# Altium PCB Buck Converter Backup.PcbDoc
Units mil, origin at the board's own origin, x right, y up, seen from the top; angles counter-clockwise.
Board outline 2160 x 1643.57 mil, 4 copper layers (Top Layer, L2 - GND, L3 - POWER, Bottom Layer), stack 23.756 mil thick; 39 components, 21 nets, 105 pads, 73 vias.
Unrouted connection lines stored in the file: 7.
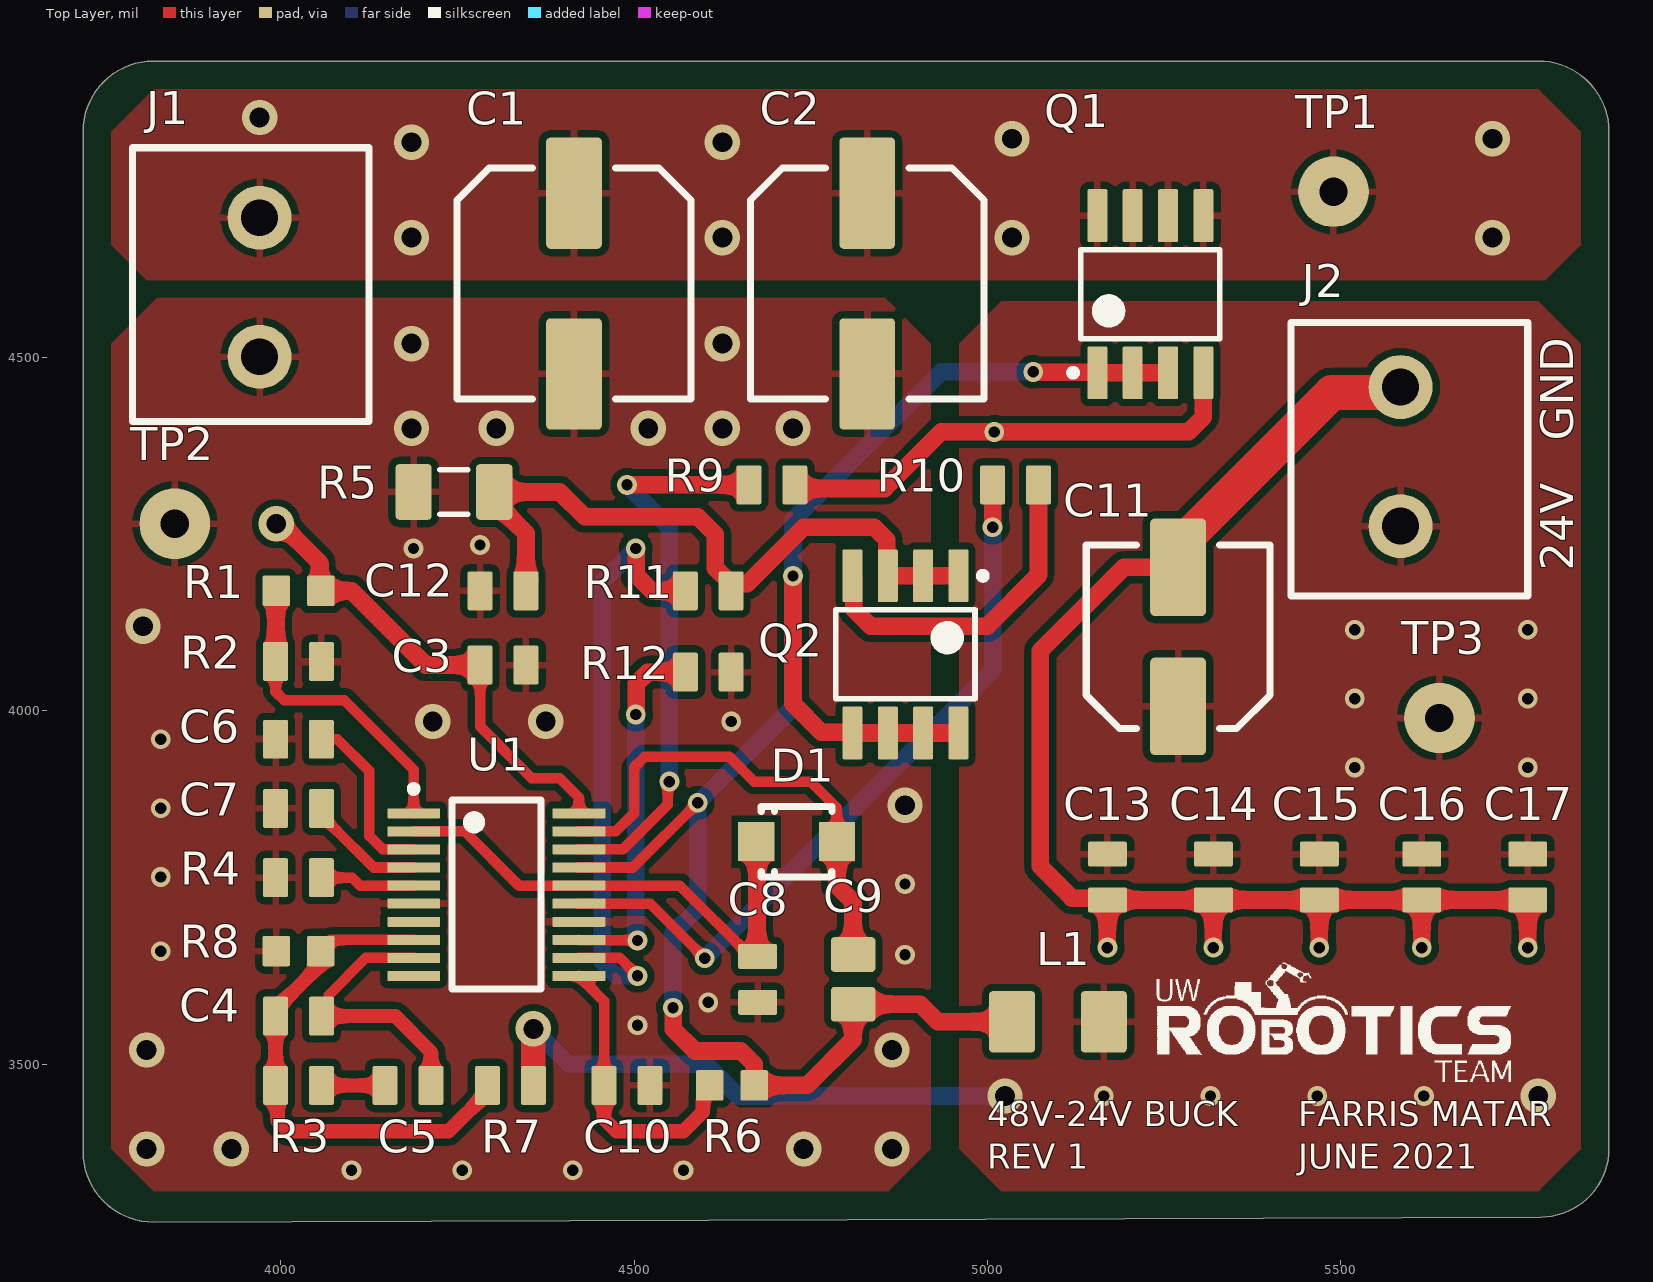
[diagram p0: Top Layer view]
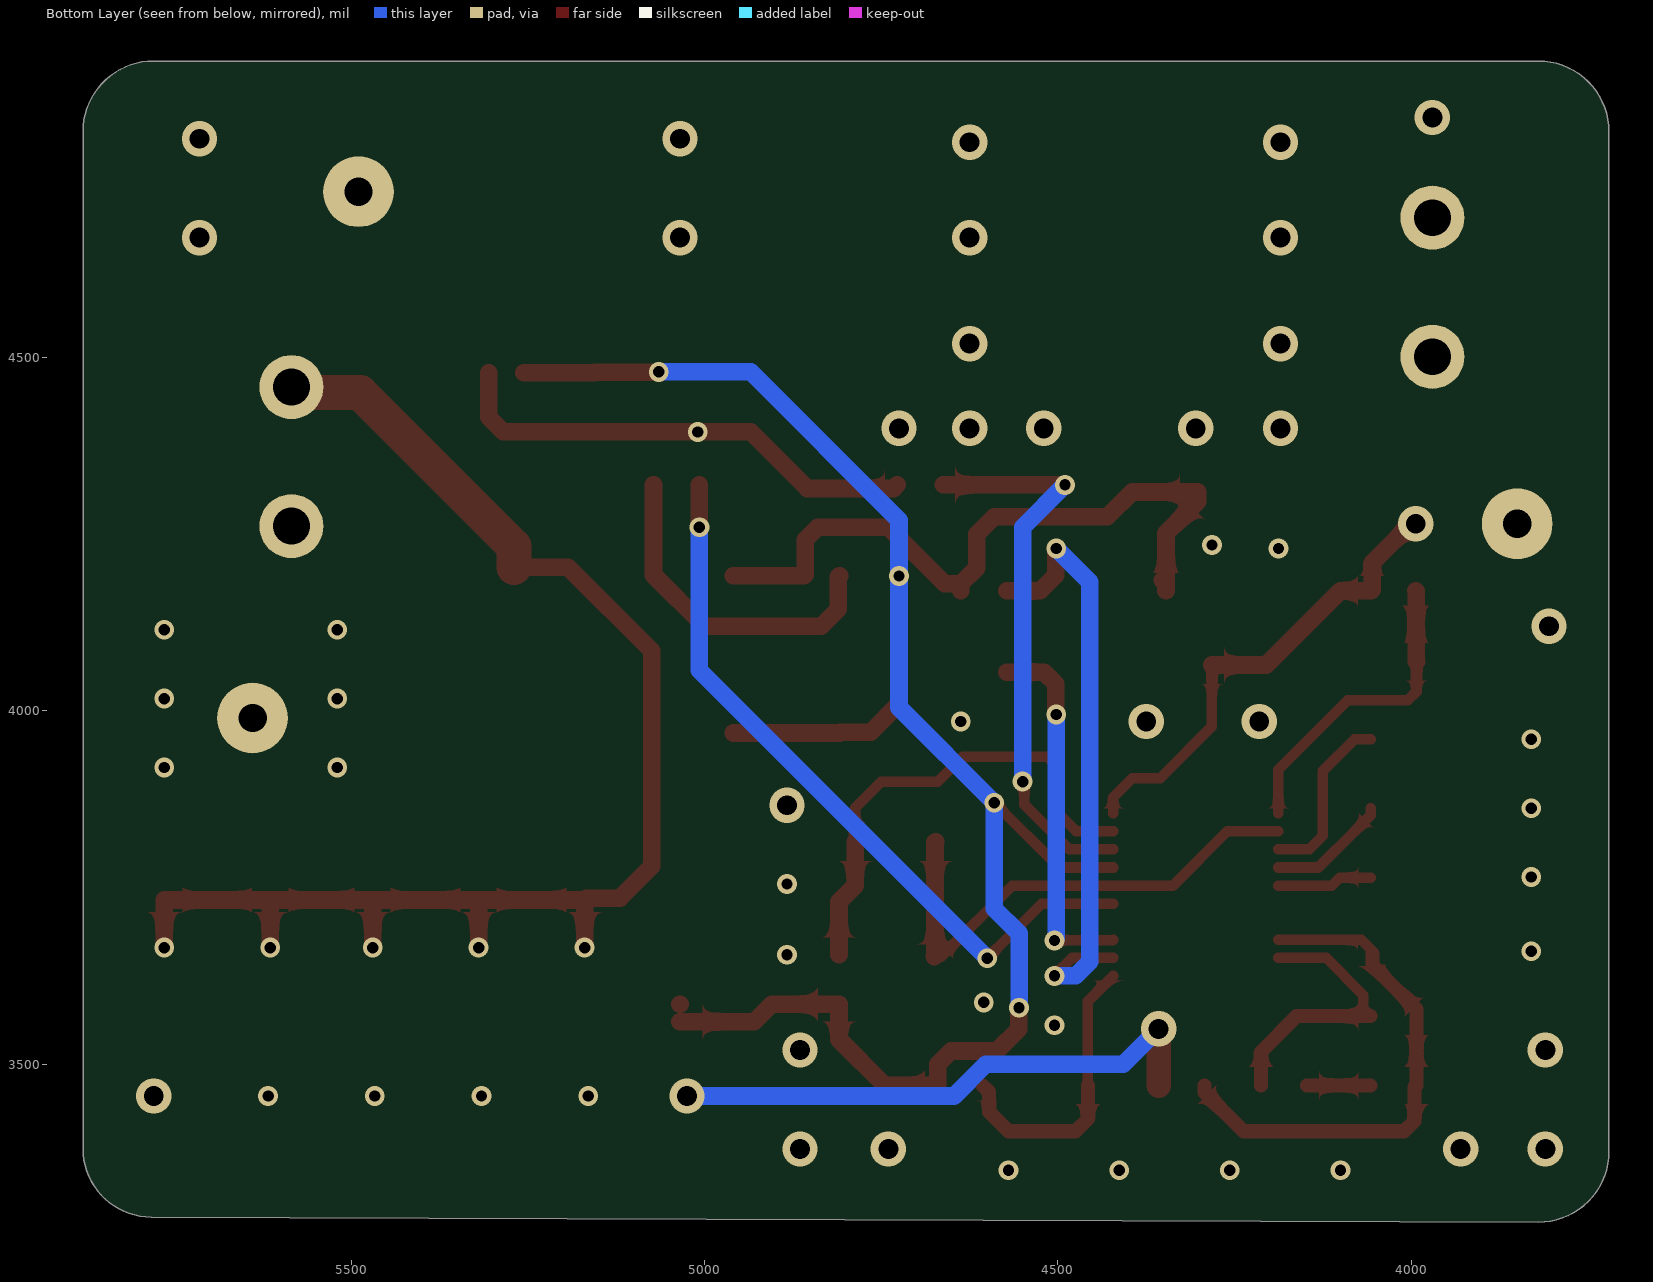
[diagram p1: Bottom Layer view, seen from below]
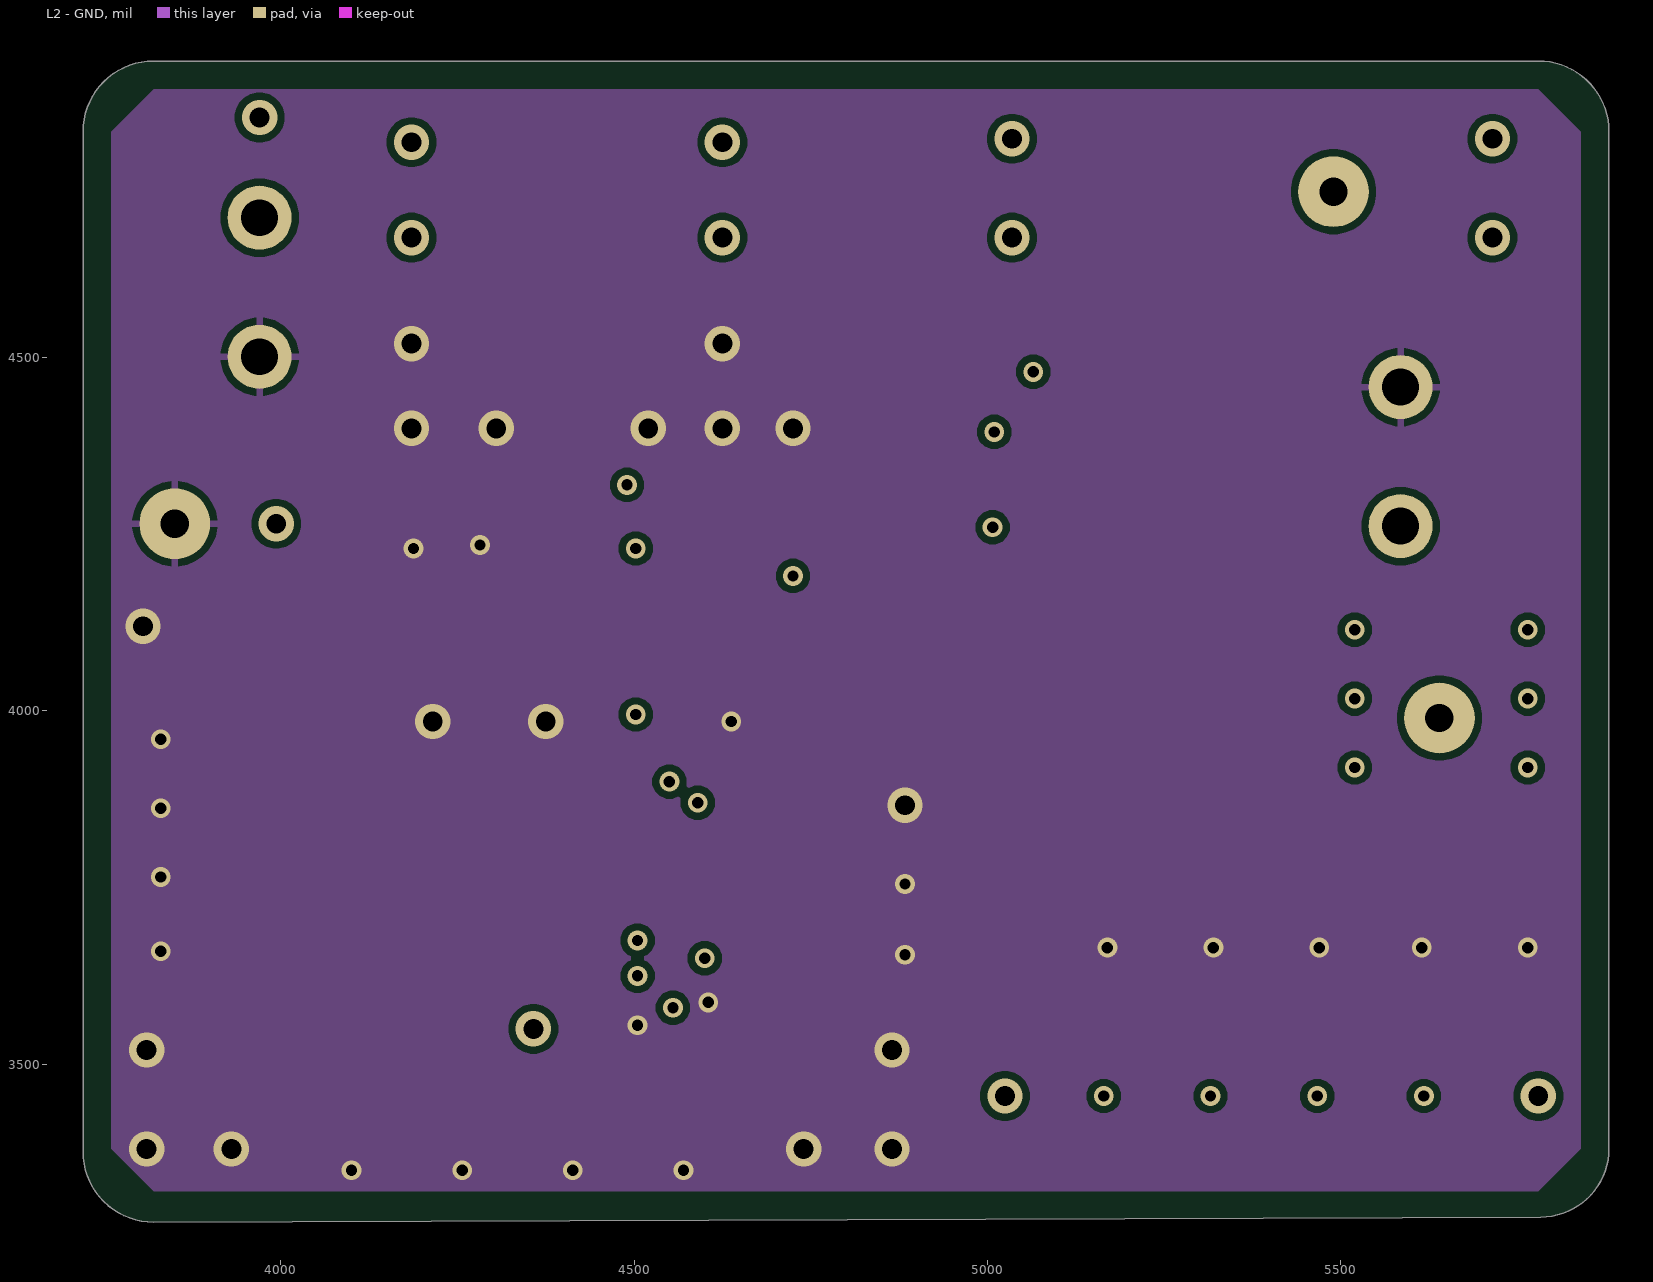
[diagram p2: L2 - GND]
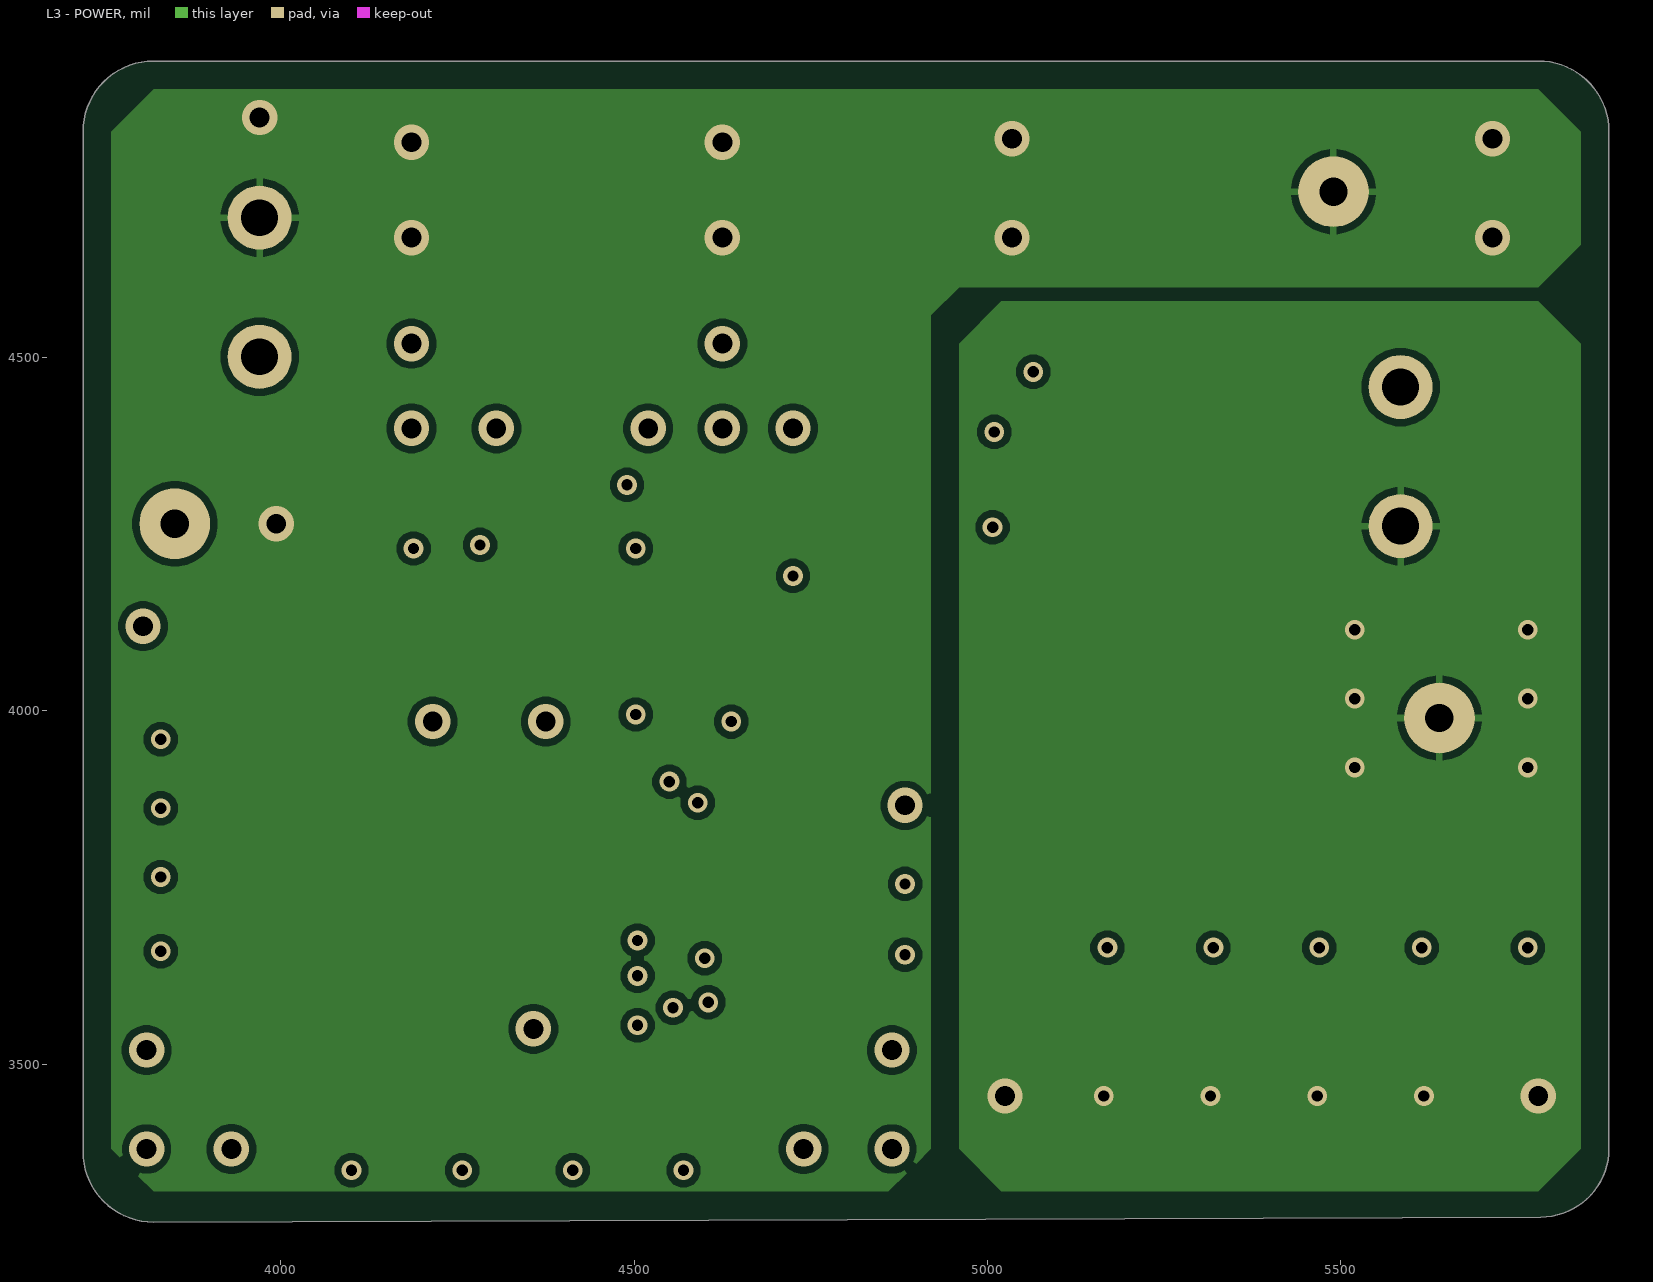
[diagram p3: L3 - POWER]
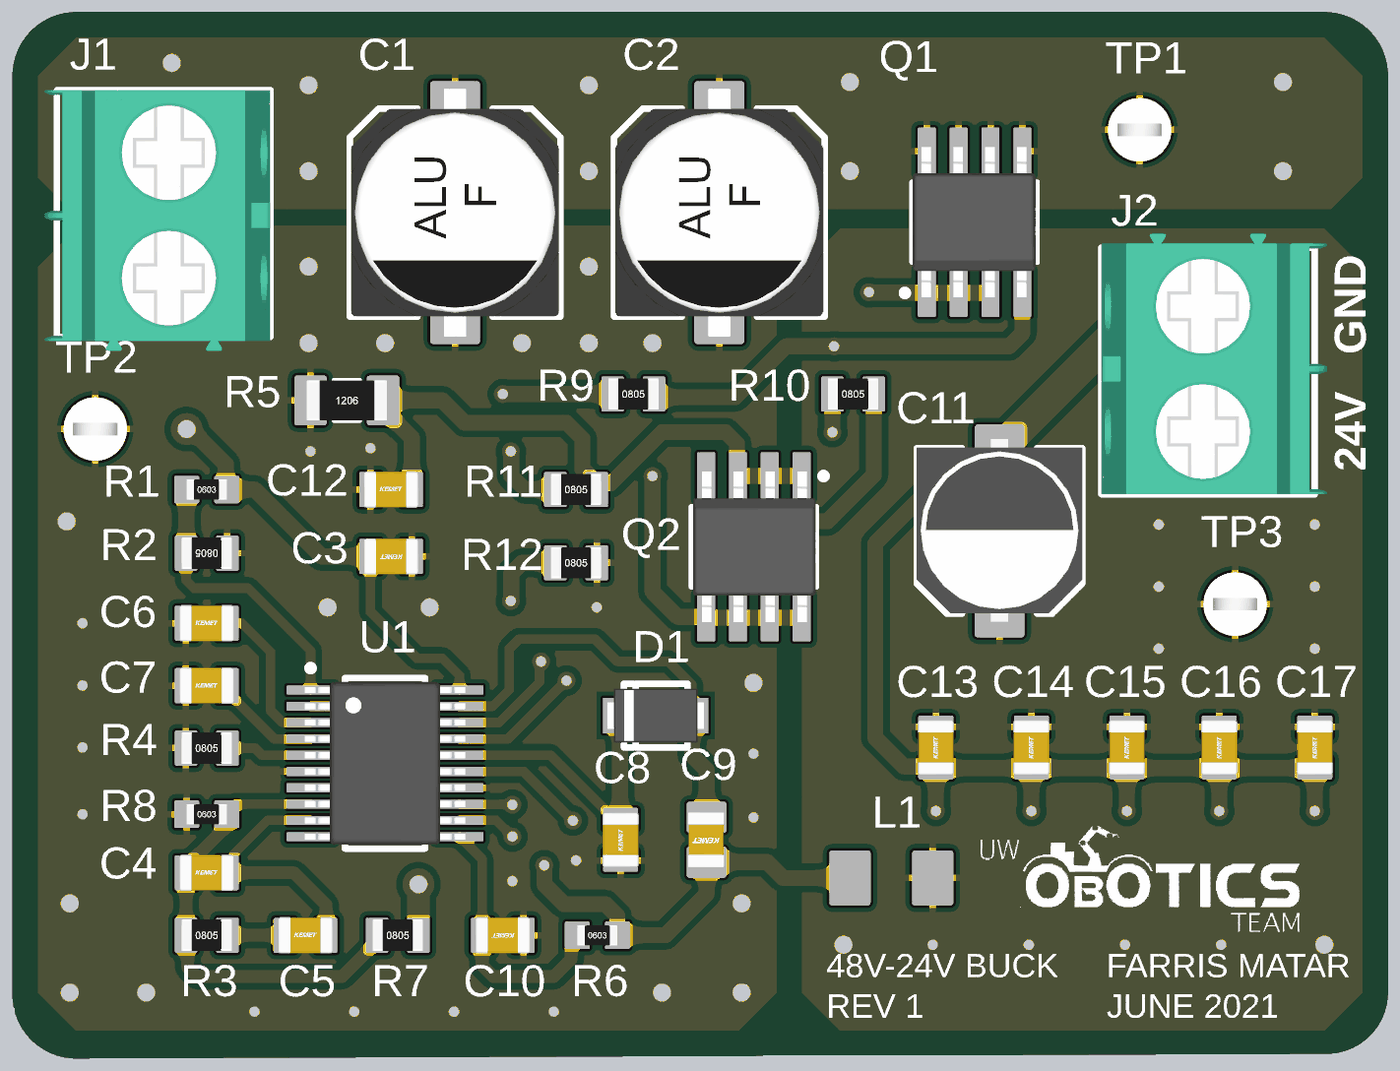
[diagram p4: 3D render of the assembled board from above, using the file's embedded part models]

## Layer stack, top to bottom
Top Solder: solder mask 0.4, Solder Resist, Dk 3.5
Top Layer: signal copper 1.4
Dielectric 2: prepreg 2.8, PP-006, Dk 4.1
L2 - GND: signal copper 1.378
Dielectric 1: dielectric 12.6, FR-4, Dk 4.8
L3 - POWER: signal copper 1.378
Dielectric 3: prepreg 2.8, PP-006, Dk 4.1
Bottom Layer: signal copper 1.4
Bottom Solder: solder mask 0.4, Solder Resist, Dk 3.5

## Board outline
3720.01,3376.43 3720,4820 cw(c3820,4820) 3820,4920 5780,4920 cw(c5780,4820) 5880,4820 5880,3378.11 5879.97,3380.3 cw(c5783.35,3380.3) 5783.35,3283.68 3820.01,3276.43 cw(c3820.01,3376.43)

## Design rules (kind name [scope] priority, off if disabled: settings)
Clearance [All] p1: gap=10 ignorepadtopadclearanceinfootprint=FALSE except(0: Arc-Hole Track-Hole SMDPad-Hole THPad-Hole Via-Hole Fill-Hole Poly-Hole Region-Hole Text-Hole)
PolygonConnect [All] p1: thpad.connectstyle=Relief thpad.reliefconductorwidth=10 thpad.reliefentries=4 thpad.polygonreliefangle="90 Angle" thpad.airgapwidth=10 smdpad.connectstyle=Relief smdpad.reliefconductorwidth=10 smdpad.reliefentries=4 smdpad.polygonreliefangle="90 Angle" smdpad.airgapwidth=10 via.connectstyle=Direct via.reliefconductorwidth=10 via.reliefentries=4 via.polygonreliefangle="90 Angle" via.airgapwidth=10
RoomDefinition "Buck Converter" [InComponentClass('Buck Converter')] p1: confinementstyle=ConfineIn formatcopy=TRUE lockcomponents=FALSE outline 3660,3060 5960,3060 5960,5000 3660,5000
RoutingVias [All] p1: holewidth=28 width=50 viastyle="Through Hole" minholewidth=28 minwidth=50 maxholewidth=28 maxwidth=50
SolderMaskExpansion [All] p1: expansion=4 istentingtop=FALSE
Width [All] p1: maxlimit=50 minlimit=10 preferedwidth=10 midlayer1_maxwidth=10 midlayer2_maxwidth=10 minimp=50.000000 maximp=50.000000 favimp=50.000000
30 further rules are at their usual default settings.

## Components (designator, comment, footprint, x,y, rotation, side; value= is the part's Value field where it differs from the comment)
C1 "CAP_22uF_80V_ALUM" RADIAL_PANASONIC_F 4415,4605 r180 top value=22µF
C2 "CAP_22uF_80V_ALUM" RADIAL_PANASONIC_F 4830,4605 r180 top value=22µF
C3 "CAP_0.1uF_100V_0805" CAP0805 4314.51,4065 r180 top value=0.1µF
C4 "CAP_150pF_16V_0805" CAP0805 4025,3568 r0 top value=150pF
C5 "CAP_330pF_50V_0805" CAP0805 4180,3470 r0 top value=330pF
C6 "CAP_0.47uF_25V_0805" CAP0805 4025,3960 r0 top value=0.47µF
C7 "CAP_0.015uF_50V_0805" CAP0805 4025,3862 r0 top value=0.015µF
C8 "CAP_0.47uF_25V_0805" CAP0805 4675,3620 r90 top value=0.47µF
C9 "CAP_0.22uF_100V_0805" CAP2012 4810,3620 r90 top value=0.22μF
C10 "CAP_820pF_50V_0805" CAP0805 4490,3470 r180 top value=820pF
C11 "CAP_100uF_35V_ALUM" RADIAL_CORNELL_D 5270,4105 r0 top value=100µF
C12 "CAP_NU_0805" CAP0805 4314.51,4170 r0 top value=NU
C13 "CAP_NU_0805" CAP0805 5765,3765 r90 top value=NU
C14 "CAP_NU_0805" CAP0805 5615,3765 r90 top value=NU
C15 "CAP_NU_0805" CAP0805 5470,3765 r90 top value=NU
C16 "CAP_NU_0805" CAP0805 5320,3765 r90 top value=NU
C17 "CAP_NU_0805" CAP0805 5170,3765 r90 top value=NU
D1 "DIO_SCHOTTKY_100V_150mA" SOD-123_FLAT 4730,3815 r0 top
J1 "CON_2POS_SCREW_TERM" 1935161 3970,4599.8 r270 top
J2 "CON_2POS_SCREW_TERM" 1935161 5585,4360 r90 top
L1 "IND_47uH_13.0A" IND_SIGNAL_SCIHP0412-R047 5100,3560 r180 top
Q1 "NMOS_100V_10.3A" 8-SOIC_NMOS 5230,4590 r90 top
Q2 "NMOS_100V_10.3A" 8-SOIC_NMOS 4885,4080 r270 top
R1 "RES_54.9kΩ_0603_1%" RES0603 3993.5,4170 r0 top value=54.9kΩ
R2 "RES_2.32kΩ_0805_1%" RES0805 4025,4070 r180 top value=2.32kΩ
R3 "RES_133kΩ_0805_1%" RES0805 4025,3470 r0 top value=133kΩ
R4 "RES_12.1kΩ_0805_1%" RES0805 4025,3764 r0 top value=12.1kΩ
R5 "RES_0.015Ω_1206_1%" RES1206 4245,4310 r0 top value=0.015Ω
R6 "RES_267kΩ_0603_1%" RES0603 4607.01,3470 r0 top value=267kΩ
R7 "RES_34.8kΩ_0805_1%" RES0805 4325,3470 r0 top value=34.8kΩ
R8 "RES_1.2kΩ_0603_1%" RES0603 3993.5,3660.09 r0 top value=1.2kΩ
R9 "RES_0Ω_0805" RES0805 4695,4320 r0 top value=0Ω
R10 "RES_0Ω_0805" RES0805 5040,4320 r0 top value=0Ω
R11 "RES_0Ω_0805" RES0805 4605,4170 r0 top value=0Ω
R12 "RES_0Ω_0805" RES0805 4605,4055 r0 top value=0Ω
TP1 "TESTPOINT_LOOP" TESTPOINT_LOOP 5490,4735 r0 top
TP2 "TESTPOINT_LOOP" TESTPOINT_LOOP 3850,4265 r0 top
TP3 "TESTPOINT_LOOP" TESTPOINT_LOOP 5640,3990 r0 top
U1 "BUCK_LM5117PWP" HTSSOP 4305,3740 r0 top

## Footprints (in the part's own frame and the unit in brackets; to place one, negate y for a bottom-side part, rotate by r counter-clockwise, add the part's x,y. Pads: shape width x height; smd on the part's side, far side on the other; paste and mask are expansions set on the pad)
8-SOIC_NMOS [mm]
  rrect15% 1.9x0.72 smd: 1(-2.827,-1.926) 2(-2.827,-0.656) 2(-2.827,0.614) 2(-2.827,1.884) 3(2.823,-1.926) 3(2.823,-0.656) 3(2.823,0.614) 3(2.823,1.884)
  silkscreen extent -2.95,-2.52 1.6,2.88, body extent -3,-2.45 3,2.45, height 1.63
1935161 [mm] "TERM BLK 2POS SIDE ENTRY 5MM PCB"
  round 2.3 hole 1.325: 1(-2.5,0) 2(2.5,0)
  silkscreen extent -5.01,-4.57 4.83,3.94, body extent -5.01,-5.06 5.39,3.94, height 11.41
CAP0805 [mm] "Chip Capacitor, Body 2.0x1.2mm, Height 0.45mm, IPC Medium Density"
  rrect15% 0.9x1.4 smd: 1(-0.825,0) 2(0.825,0)
  body extent -1.1,-0.73 1.1,0.73, height 1.39
CAP2012 [mm]
  rrect20% 1.25x1.6 smd: 1(-0.895,0) 2(0.895,0)
  body extent -1.1,-0.7 1.1,0.75, height 1.41
HTSSOP [mm]
  rrect15% 1.9x0.36 smd: 1(-2.97,2.925) 2(-2.97,2.275) 3(-2.97,1.625) 4(-2.97,0.975) 5(-2.97,0.325) 6(-2.97,-0.325) 7(-2.97,-0.975) 8(-2.97,-1.625) 9(-2.97,-2.275) 10(-2.97,-2.925) 11(2.97,-2.925) 12(2.97,-2.275) 13(2.97,-1.625) 14(2.97,-0.975) 15(2.97,-0.325) 16(2.97,0.325) 17(2.97,0.975) 18(2.97,1.625) 19(2.97,2.275) 20(2.97,2.925)
  silkscreen extent -3.09,-3.4 1.6,3.92, body extent -3.2,-3.25 3.2,3.25, height 1.1
IND_SIGNAL_SCIHP0412-R047 [mm]
  rrect15% 1.65x2.2 smd: 1(-1.65,0) 2(1.65,0)
RADIAL_CORNELL_D [mm] "Size D radial surface mount capacitor"
  rrect15% 2x3.5 smd: 1(0,-2.5) 2(0,2.5)
  silkscreen extent -3.3,-3.3 3.3,3.3, body extent -3.3,-3.62 3.3,3.67, height 5.9
RADIAL_PANASONIC_F [mm]
  rrect15% 2x4 smd: 1(0,-3.25) 2(0,3.25)
  silkscreen extent -4.2,-4.15 4.2,4.15, body extent -4.15,-4.95 4.15,4.95, height 10.2
RES0603 [mm] "Chip Resistor, Body 1.6x0.8mm, IPC Medium Density"
  rrect15% 1x1.1 smd: 1(0,0) 2(1.6,0)
  body extent 0,-0.4 1.6,0.4, height 0.46
RES0805 [mm] "Chip Resistor, 2-Leads, Body 2.00x1.25mm, IPC High Density"
  rrect15% 0.9x1.4 smd: 1(-0.825,0) 2(0.825,0)
  body extent -1,-0.62 1,0.63, height 0.61
RES1206 [mm] "Chip Resistor, Body 3.2x1.6mm, IPC Medium Density"
  rrect20% 1.3x2 smd: 1(-1.45,0) 2(1.45,0)
  silkscreen extent -0.5,-0.8 0.5,0.8, body extent -1.6,-0.8 1.6,0.8, height 0.61
SOD-123_FLAT [mm]
  rect 1.3x1.4 smd: 1(-1.45,0) 2(1.45,0)
  silkscreen extent -1.27,-1.27 1.27,1.27, body extent -1.93,-1.08 1.92,1.08, height 1.35
TESTPOINT_LOOP [mm]
  round 2.54 hole 1.02: 1(0,0)
  body extent -1.27,-1.27 1.27,1.27, height 4.57

## Part data
C1 C2: "CAP ALUM POLY 22UF 20% 80V SMD", Manufacturer 1="Panasonic Electronic Components", Manufacturer Part Number 1=EEH-ZA1K220P, Package/Footprint=SMD, Supplier Part Number 1=P122641CT-ND, Voltage Rating=80V, Mounting Type=SMD, Supplier 1=Digi-Key
C3: "CAP CER 0.1UF 100V X7R 0805", Manufacturer 1="TDK Corporation", Manufacturer Part Number 1=C2012X7R2A104K125AA, Package/Footprint=0805, Supplier Part Number 1=445-1418-1-ND, Voltage Rating=100V, Supplier 1=Digi-Key
C4: "CAP CER 150PF 16V X7R 0805", Manufacturer 1="Würth Elektronik", Manufacturer Part Number 1=885012207028, Package/Footprint=0805, Supplier Part Number 1=732-8028-1-ND, Voltage Rating=16V, Supplier 1=Digi-Key
C5: "CAP CER 330PF 50V C0G/NPO 0805", Manufacturer 1=Yageo, Manufacturer Part Number 1=CC0805JRNPO9BN331, Package/Footprint=0805, Supplier Part Number 1=311-1117-1-ND, Voltage Rating=50V, Supplier 1=Digi-Key
C6 C8: "CAP CER 0.47UF 25V X5R 0805", Manufacturer 1=KEMET, Manufacturer Part Number 1=C0805C474K3PAC7800, Package/Footprint=0805, Supplier Part Number 1=399-15508-1-ND, Voltage Rating=25V, Supplier 1=Digi-Key
C7: "CAP CER 0.015UF 50V C0G 0805", Manufacturer 1="TDK Corporation", Manufacturer Part Number 1=CGA4F2C0G1H153J085AA, Package/Footprint=0805, Supplier Part Number 1=445-6948-1-ND, Voltage Rating=50V, Supplier 1=Digi-Key
C9: "CAP CER 0.22UF 100V X7R 0805", Dielectric=X7R, Manufacturer 1="Taiyo Yuden", Manufacturer Part Number 1=HMJ212BB7224KGHT, Package/Footprint=0805, Supplier Part Number 1=587-4221-1-ND, Voltage Rating=100V, Mounting Type=SMD, Supplier 1=Digi-Key
C10: "CAP CER 820PF 50V C0G/NP0 0805", Manufacturer 1=KEMET, Manufacturer Part Number 1=C0805X821J5GAC7800, Package/Footprint=0805, Supplier Part Number 1=399-19481-1-ND, Voltage Rating=50V, Supplier 1=Digi-Key
C11: "CAP ALUM 100UF 20% 35V SMD", Manufacturer 1=Nichicon, Manufacturer Part Number 1=UWD1V101MCL1GS, Package/Footprint=SMD, Supplier Part Number 1=493-9685-1-ND, Voltage Rating=35V, Mounting Type=SMD, Supplier 1=Digi-Key
C12 C13 C14 C15 C16 C17: "PLACEHOLDER CAPACITOR 0805", Package/Footprint=0805, Mounting Type=SMD
D1: "DIODE SCHOTTKY 100V 150MA SOD123", Manufacturer 1="Comchip Technology", Manufacturer Part Number 1=CDBW46-G, Package/Footprint=SOD-123, Supplier Part Number 1=641-1964-1-ND, Mounting Type=SMD, Supplier 1=Digi-Key, Vr (Max)=100V
J1 J2: "TERM BLK 2POS SIDE ENTRY 5MM", Manufacturer 1="Phoenix Contact", Manufacturer Part Number 1=1935161, Package/Footprint=SMD, Supplier Part Number 1=277-1667-ND, Mounting Type=TH, Supplier 1=Digi-Key
L1: "FIXED IND 47NH 13A SMD", Current Rating=13A, DC Resistance (DCR)=3.75mR, Inductance=47μH, Inductance Tolerance=20%, Manufacturer 1="Signal Transformer", Manufacturer Part Number 1=SCIHP0412-R047, Saturation Current=32A, Supplier Part Number 1=595-1757-1-ND, Test Frequency=200kHz, Mounting Type=SMD, Supplier 1=Digi-Key
Q1 Q2: "MOSFET N-CH 100V 10.3A 8SOIC", Manufacturer 1="Vishay Siliconix", Manufacturer Part Number 1=SI4058DY-T1-GE3, Package/Footprint=8-SOIC, Supplier Part Number 1=SI4058DY-T1-GE3CT-ND, Id=10.3A, Supplier 1=Digi-Key, Vdss=100V, Vgs (Max)=±20V
R1: "RES SMD 54.9K OHM 1% 1/10W 0603", Manufacturer 1="Vishay Dale", Manufacturer Part Number 1=CRCW060354K9FKEA, Package/Footprint=0603, Supplier Part Number 1=541-54.9KHCT-ND, Supplier 1=Digi-Key
R2: "RES 2.32K OHM 1% 1/4W 0805", Manufacturer 1="Stackpole Electronics Inc", Manufacturer Part Number 1=RNCP0805FTD2K32, Package/Footprint=0805, Supplier Part Number 1=RNCP0805FTD2K32CT-ND, Supplier 1=Digi-Key
R3: "RES SMD 133K OHM 1% 1/8W 0805", Manufacturer 1=Yageo, Manufacturer Part Number 1=RC0805FR-07133KL, Package/Footprint=0805, Supplier Part Number 1=311-133KCRCT-ND, Supplier 1=Digi-Key
R4: "RES 12.1K OHM 1% 1/4W 0805", Manufacturer 1="Stackpole Electronics Inc", Manufacturer Part Number 1=RNCP0805FTD12K1, Package/Footprint=0805, Supplier Part Number 1=RNCP0805FTD12K1CT-ND, Supplier 1=Digi-Key
R5: "RES 0.015 OHM 1% 1/2W 1206", Manufacturer 1="Stackpole Electronics Inc", Manufacturer Part Number 1=CSR1206FK15L0, Package/Footprint=1206, Supplier Part Number 1=CSR1206FK15L0CT-ND, Supplier 1=Digi-Key
R6: "RES SMD 267K OHM 1% 1/10W 0603", Manufacturer 1="Panasonic Electronic Components", Manufacturer Part Number 1=ERJ-3EKF2673V, Package/Footprint=0603, Supplier Part Number 1=P267KHCT-ND, Supplier 1=Digi-Key
R7: "RES 34.8K OHM 1% 1/8W 0805", Manufacturer 1="Stackpole Electronics Inc", Manufacturer Part Number 1=RMCF0805FT34K8, Package/Footprint=0805, Supplier Part Number 1=RMCF0805FT34K8CT-ND, Supplier 1=Digi-Key
R8: "RES SMD 1.2K OHM 1% 1/10W 0603", Manufacturer 1=Yageo, Manufacturer Part Number 1=RC0603FR-071K2L, Package/Footprint=0603, Supplier Part Number 1=311-1.20KHRCT-ND, Supplier 1=Digi-Key
R9 R10 R11 R12: "RES 0 OHM JUMPER 1/8W 0805", LCSC Part #=C17477, Manufacturer 1="Panasonic Electronic Components", Manufacturer Part Number 1=ERJ-6GEY0R00V, Package/Footprint=0805, Supplier Part Number 1=P0.0ACT-ND, Mounting Type=SMD, Supplier 1=Digi-Key
TP1 TP2 TP3: "TESTPOINT THRUHOLE", Manufacturer 1="Keystone Electronics", Manufacturer Part Number 1=5002, Package/Footprint=TH, Supplier Part Number 1=36-5002-ND, Mounting Type=TH, Supplier 1=Digi-Key
U1: "IC REG CTRLR BUCK 20TSSOP", Manufacturer 1="Texas Instruments", Manufacturer Part Number 1=LM5117PMH/NOPB, Package/Footprint=20-HTSSOP, Supplier Part Number 1=296-41310-1-ND, Mounting Type=SMD, Supplier 1=Digi-Key

## Via types
v1: diameter 28, hole 16, Top Layer to Bottom Layer, tented both sides, 43 vias
v2: diameter 50, hole 28, Top Layer to Bottom Layer, tented both sides, 30 vias

## Nets (pads, with @x,y where several pads share a name; then routed paths per layer and width w, separated by ;. In a path a pad name is that pad's centre, name@x,y a point inside that pad or via, vN(x,y) a via of type N, cw(c..) or ccw(c..) an arc to the next point about the centre after c; other vN are vias at no path point)
24V: C11.1 C13.2 C14.2 C15.2 C16.2 C17.2 J2.1 L1.1 R7.2 TP3.1 | length 786.9
  Top Layer w35: R7.2 v2(4357.48,3550)
  Bottom Layer w25: v2(4357.48,3550) 4407.48,3500 4602.03,3500 4647.03,3455 v2(5025,3455)
  other v1: 5165,3455 5316,3455 5467,3455 5618,3455 5520,3920 5765,3920 5520,4017.5 5765,4017.5 5520,4115 5765,4115
  other v2: 5780,3455
GND: C1.2 C2.2 C3.1 C6.1 C7.1 C8.1 C10.1 C11.2 C12.1 C13.1 C14.1 C15.1 C16.1 C17.1 J1.2 J2.2 R2.1 R4.1 R5.1 R8.1 R12.2 TP2.1 U1.6 U1.14 | length 2034.2
  Top Layer w25: v1(5170,3665) C17.1 ; C11.2 5193.43,4203.43 5075,4085 5075,3780 5120,3735 5167.52,3735 C17.1 ; v1(5320,3665) C16.1 ; v1(5470,3665) C15.1 ; v1(5615,3665) C14.1 ; v1(5765,3665) C13.1 C14.1 ; C17.1 C16.1 ; C16.1 C15.1 C15.1 ; C15.1 C14.1
  Top Layer w50: C11.2 5270,4232.95 5487.72,4450.67 5577.24,4450.67 J2.2
  other v1: 4100,3350 4256.67,3350 4413.33,3350 4570,3350 4505,3555 4605,3587.52 4883.59,3655 3830,3660 4883.59,3755.21 3830,3765 3830,3862.25 3830,3960 4637.48,3985 4187.91,4230 4282.03,4235
  other v2: 3810,3380 3930,3380 4740,3380 4865,3380 3810,3520 4865,3520 4883.59,3866.41 4215,3985 4375,3985 3805,4120 4185,4400 4305,4400 4520,4400 4625,4400 4725,4400 4185,4520 4625,4520
NetC4_1: C4.1 R3.1 R7.1 R8.2 U1.8 | length 743.3
  Top Layer w15: R8.2@4055,3656.48 cw(c4060.11,3656.48) R8.2 4056.5,3662.06 4070.46,3676.02 U1.8
  Top Layer w20: R8.2@4055,3656.48 4055,3640 4035,3620 4034.68,3620 3992.52,3577.84 C4.1 R3.1 3995.24,3467.28 3995.24,3419.76 4010,3405 4237.36,3405 4292.52,3460.16 R7.1
NetC4_2: C4.2 C5.2 U1.9 | length 399.6
  Top Layer w15: C4.2 4067.7,3578.22 4067.7,3597.7 4120.43,3650.43 U1.9
  Top Layer w20: C4.2 4162,3568 4212.48,3517.52 C5.2
NetC5_1: C5.1 R3.2 | length 90
  Top Layer w20: R3.2 C5.1
NetC6_2: C6.2 U1.3 | length 248.9
  Top Layer w15: C6.2 4080,3960 4125,3915 4125,3823.31 4144.11,3804.19 4187.85,3804.19 U1.3
NetC7_2: C7.2 U1.4 | length 171
  Top Layer w15: C7.2 4057.48,3852.16 4104.64,3805 4105,3805 4131.61,3778.39 U1.4
NetC8_2: C8.2 D1.1 U1.2 U1.16 | length 723.7
  Top Layer w15: U1.2 4260.43,3829.57 4337.2,3752.8 U1.16 4564.84,3752.8 4665.16,3652.48 C8.2
  Top Layer w25: D1.1 4673.96,3813.96 4673.96,3653.52 C8.2
NetC9_1: C9.1 L1.2 Q1.2 Q2.3 R6.2 U1.17 | length 2665.4
  Top Layer w15: U1.17 4498.39,3778.39 v1(4590,3870)
  Top Layer w25: v1(4555,3580) 4555.57,3579.43 4555.57,3549.43 4586.22,3518.78 4651.22,3518.78 4670,3500 R6.2 4745,3470 4810,3535 C9.1 4810.24,3585 4905,3585 4930,3560 L1.2 ; v1(4725,4191.14) 4725,4010 4765,3970 4808.04,3970 4809.18,3968.86 4859.18,3968.86 4909.18,3968.86 Q2.3@4959.18,3968.86 ; L1.2@5034.8,3584.76 L1.2@5035.04,3585 ; v1(5065,4480) 5065.57,4479.43 5155.1,4479.43 5155.82,4478.7 5205.82,4478.7 Q1.2@5255.82,4478.7
  Bottom Layer w25: v1(4555,3580) 4555,3685 4590,3720 v1(4590,3870) 4725,4005 v1(4725,4191.14) 4725,4270 4935,4480 v1(5065,4480)
NetC9_2: C9.2 D1.2 U1.19 | length 693.7
  Top Layer w15: U1.19 4474.21,3829.57 4500,3855.36 4500,3920 4515,3935 4635,3935 4670,3900 4750,3900 4787.09,3862.91 D1.2
  Top Layer w25: D1.2 4787.09,3752.91 4810,3730 C9.2
NetC10_2: C10.2 R6.1 U1.11 | length 417.2
  Top Layer w15: U1.11 4457.52,3589.25 C10.2
  Top Layer w20: C10.2 4457.52,3422.48 4475,3405 4570,3405 4597.32,3432.32 4597.32,3460.31 R6.1
NetC12_2: C12.2 Q2.2 R5.2 R11.2 | length 1007.5
  Top Layer w25: C12.2 C12.2@4346.99,4179.84 ; C12.2@4352.2,4185.06 C12.2@4346.99,4179.84 ; R11.2 R11.2@4637.48,4174.78 ; Q2.2@4959.18,4191.3 4909.18,4191.3 4859.18,4191.3 4857.51,4192.97 4857.51,4242.49 4840,4260 4740,4260 4660,4180 4642.7,4180 R11.2@4637.48,4174.78 ; C12.2@4346.99,4179.84 4346.99,4251.32 4302.09,4296.22 R5.2 4395,4310 4430,4275 4590,4275 4615,4250 4615,4202.32 4637.48,4179.84 R11.2@4637.48,4174.78
NetQ1_1: Q1.1 R9.2 | length 685.1
  Top Layer w25: R9.2 4732.48,4315 4855,4315 4935,4395 v1(5010,4395) 5285,4395 5305.82,4415.82 Q1.1
NetQ2_1: Q2.1 R10.2 | length 477
  Top Layer w25: Q2.1 4810.85,4189.62 4810.85,4144.15 4835,4120 5000,4120 5072.48,4192.48 R10.2
NetR1_1: R1.1 R2.2 U1.1 | length 446
  Top Layer w15: R2.2 3992.52,4027.48 4005,4015 4090,4015 4188.07,3916.93 U1.1
  Top Layer w25: R2.2 3993.01,4070.49 3993.01,4169.51 R1.1
NetR4_2: R4.2 U1.5 | length 135.2
  Top Layer w15: R4.2 4101,3764 4112.2,3752.8 U1.5
NetR9_1: R9.1 U1.18 | length 802.8
  Top Layer w15: U1.18 4483.98,3803.98 4547.51,3867.51 4547.51,3897.51 v1(4550,3900)
  Top Layer w25: v1(4490,4320) R9.1
  Bottom Layer w25: v1(4490,4320) 4550,4260 v1(4550,3900)
NetR10_1: R10.1 U1.15 | length 1048.9
  Top Layer w15: U1.15 4522.8,3727.2 v1(4600,3650)
  Top Layer w25: v1(5007.52,4260) R10.1
  Bottom Layer w25: v1(4600,3650) 5007.52,4057.52 v1(5007.52,4260)
NetR11_1: R11.1 U1.12 | length 873.4
  Top Layer w15: U1.12 4479.57,3650.43 v1(4505,3625)
  Top Layer w25: v1(4502.52,4230) 4503.09,4229.43 4503.09,4191.91 4525,4170 R11.1
  Bottom Layer w25: v1(4502.52,4230) 4455,4182.48 4455,3645 4475,3625 v1(4505,3625)
NetR12_1: R12.1 U1.13 | length 524.5
  Top Layer w15: U1.13 4422.34,3675.61 4504.39,3675.61 v1(4505,3675)
  Top Layer w25: v1(4502.52,3995) 4503.09,3995.57 4503.09,4038.45 4519.64,4055 R12.1
  Bottom Layer w25: v1(4502.52,3995) 4502.52,3678.29 4505,3675.81 v1(4505,3675)
VBAT: C1.1 C2.1 C3.2 J1.1 Q1.3 R1.2 TP1.1 U1.20 | length 685.1
  Top Layer w15: C3.2 4282.03,3977.97 4355,3905 4395,3905 4421.93,3878.07 U1.20
  Top Layer w25: v2(3993.5,4265) 4000,4265 4055,4210 4055,4171.5 R1.2 4100,4170 4205,4065 C3.2
  other v2: 4185,4670 4625,4670 5035,4670 5715,4670 4185,4805 4625,4805 5035,4810 5715,4810 3970,4840
pads on no net: U1.7 U1.10

## Polygon pours and split planes (outlines as drawn)
24V on Top Layer "24V_L01_P03" (solid, pour order 4): 4960,4520 5020,4580 5780,4580 5840,4520 5840,3380 5780,3320 5020,3320 4960,3380
GND on Top Layer "GND_L01_P02" (solid, pour order 1): 3825,4585 3760,4520 3760,3380 3820,3320 4860,3320 4920,3380 4920,4520 4855,4585
VBAT on Top Layer "VBAT_L01_P01" (solid, pour order 0): 3760,4820 3760,4660 3810,4610 5790,4610 5840,4660 5840,4820 5780,4880 3820,4880
24V on L3 - POWER "24V_L03_P06" (solid, pour order 8): 5780,4580 5840,4520 5840,3380 5780,3320 5020,3320 4960,3380 4960,4520 5020,4580
VBAT on L3 - POWER "VBAT_L03_P05" (solid, pour order 7): 3820,4880 5780,4880 5840,4820 5840,4660 5780,4600 4960,4600 4920,4560 4920,3380 4860,3320 3820,3320 3760,3380 3760,4820
GND on L2 - GND "GND_L02_P04" (solid, pour order 5): 3760,4820 3820,4880 5780,4880 5840,4820 5840,3380 5780,3320 3820,3320 3760,3380

## Silkscreen, mask and mechanical layers (free items; w line width, h text height)
Top Overlay:
  drawing of 16 lines, arcs and shapes, not listed
  text "GND" at 5844.85,4382.43 h80 r90
  text "24V" at 5845,4198.79 h80 r90
  text "48V-24V BUCK / REV 1" at 5000,3340 h60
  text "FARRIS MATAR / JUNE 2021" at 5440,3340 h60
Mechanical 1:
  lines w10: 5879.97,3380.3 cw(c5783.35,3380.3) 5783.35,3283.68 3820.01,3276.43 cw(c3820.01,3376.43) 3720.01,3376.43 3720,4820 cw(c3820,4820) 3820,4920 5780,4920 cw(c5780,4820) 5880,4820 5880,3378.11